# Altium PCB AccTop.PcbDoc
Units mil, origin at the board's own origin, x right, y up, seen from the top; angles counter-clockwise.
Board outline 12807.23 x 5466.85 mil, 2 copper layers (Top Layer, Bottom Layer), stack 42.17 mil thick; 34 components, 32 nets, 123 pads, 31 vias.
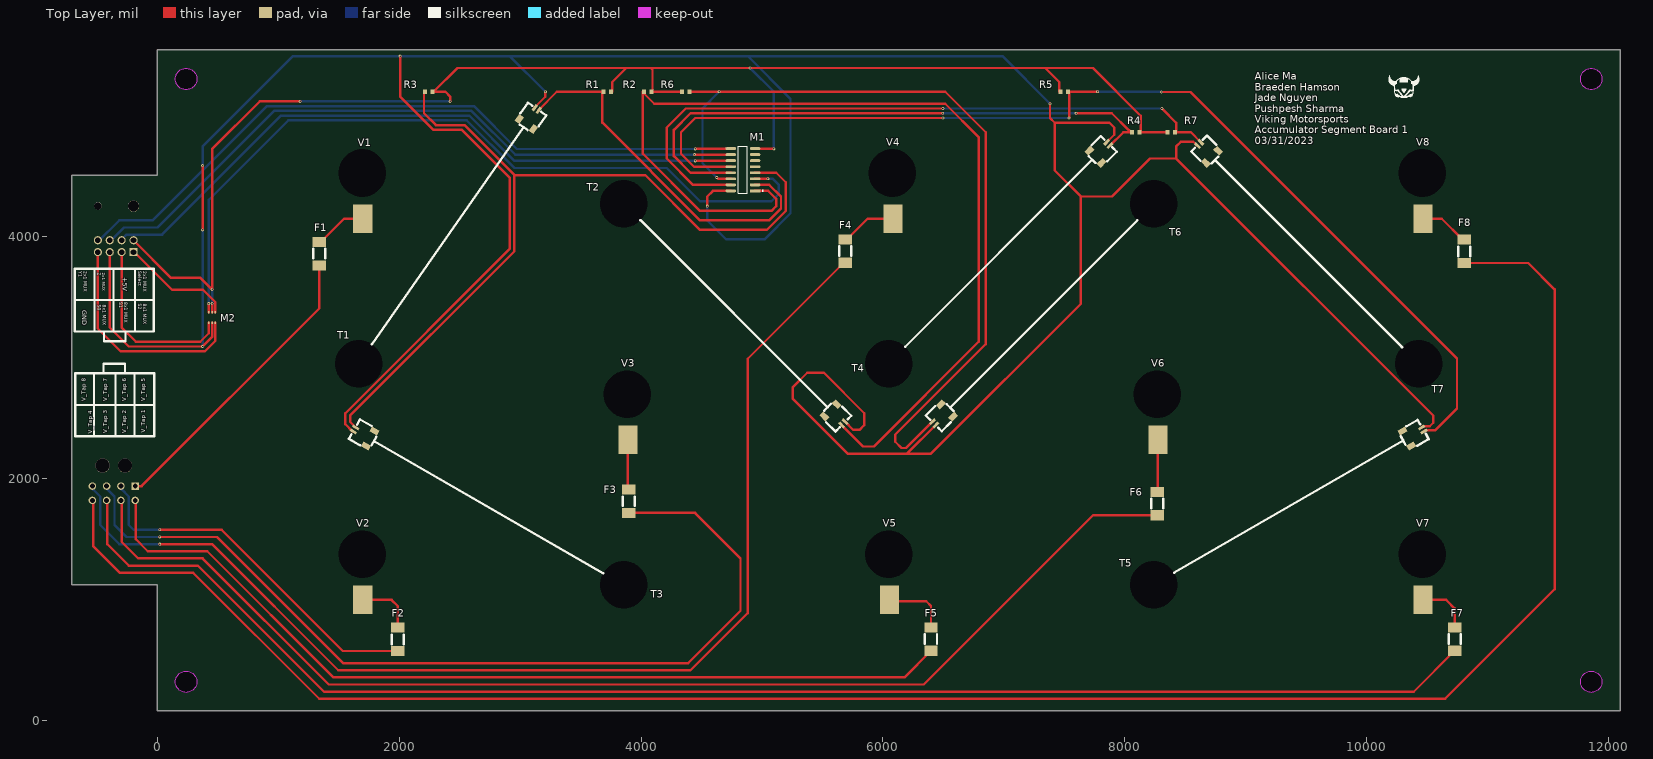
[diagram p0: Top Layer view]
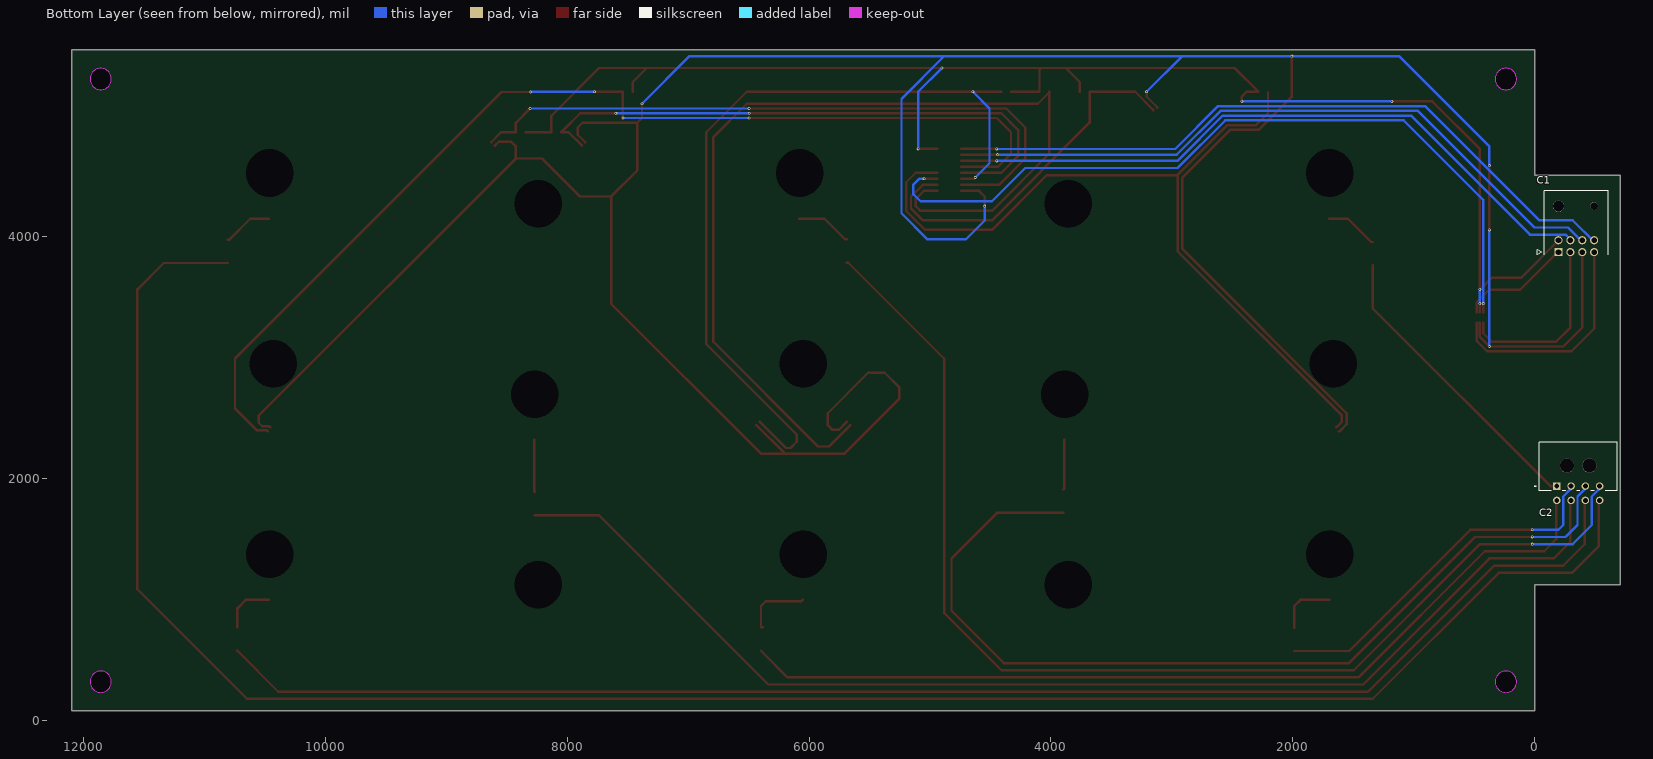
[diagram p1: Bottom Layer view, seen from below]
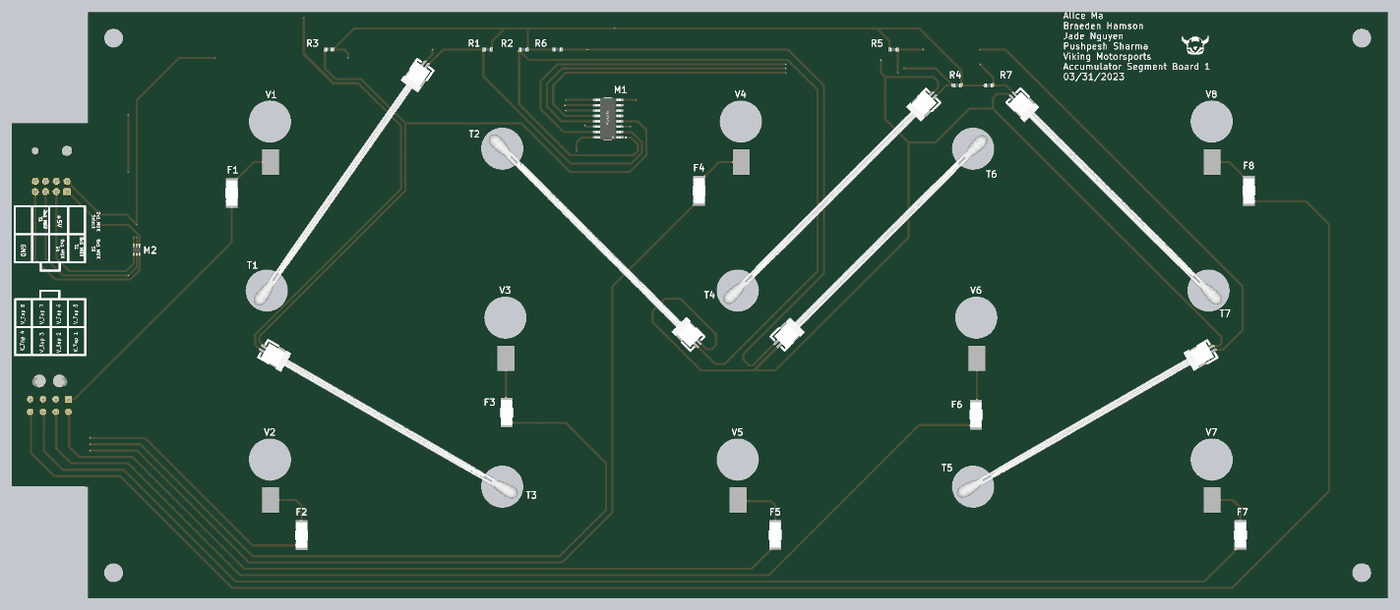
[diagram p2: 3D render of the assembled board from above, using the file's embedded part models]

## Layer stack, top to bottom
Top Solder: solder mask 0.4, Solder Resist, Dk 3.5
Top Layer: signal copper 1.4
Dielectric 1: dielectric 39.3701, FR-4, Dk 4.8
Bottom Layer: signal copper 1.4
Bottom Solder: solder mask 0.4, Solder Resist, Dk 3.5

## Board outline
0.54,4507.87 -708.66,4507.87 -708.66,1122.05 -118.11,1122.05 0.54,1122.05 0.54,78.74 12098.57,78.74 12098.57,5545.59 0.54,5545.59
cut-out: 11858.22,5214.43 cw(c11858.22,5302.93) 11769.72,5302.93 cw(c11858.22,5302.93) 11858.22,5391.43 cw(c11858.22,5302.93) 11946.72,5302.93 cw(c11858.22,5302.93)
cut-out: 11858.22,229.31 cw(c11858.22,317.81) 11769.72,317.81 cw(c11858.22,317.81) 11858.22,406.31 cw(c11858.22,317.81) 11946.72,317.81 cw(c11858.22,317.81)
cut-out: 237.82,229.31 cw(c237.82,317.81) 149.32,317.81 cw(c237.82,317.81) 237.82,406.31 cw(c237.82,317.81) 326.32,317.81 cw(c237.82,317.81)
cut-out: 237.82,5214.43 cw(c237.82,5302.93) 149.32,5302.93 cw(c237.82,5302.93) 237.82,5391.43 cw(c237.82,5302.93) 326.32,5302.93 cw(c237.82,5302.93)

## Design rules (kind name [scope] priority, off if disabled: settings)
Clearance [All] p1: gap=0.3 ignorepadtopadclearanceinfootprint=FALSE
PolygonConnect [All] p1: connectstyle=Relief reliefconductorwidth=10 reliefentries=4 polygonreliefangle="90 Angle" airgapwidth=10
RoutingVias [All] p1: holewidth=11.81 width=23.62 viastyle="Through Hole" minholewidth=11.81 minwidth=23.62 maxholewidth=11.81 maxwidth=23.62
SolderMaskExpansion [All] p1: expansion=4 istentingtop=FALSE
Width [All] p1: maxlimit=19.68 minlimit=11.81 preferedwidth=19.68
30 further rules are at their usual default settings.

## Components (designator, comment, footprint, x,y, rotation, side; value= is the part's Value field where it differs from the comment)
C1 "1053141208" "8 PIN DUAL NANO CONNECTOR" -196.85,3870.87 r0 bottom
C2 "0430450800" "8 PIN DUAL CONNECTOR" -360.24,2092.32 r0 bottom
F1 "0ACG-1000-TE" Fuse 1338.58,3858.27 r90 top
F2 "0ACG-1000-TE" Fuse 1988.19,669.29 r90 top
F3 "0ACG-1000-TE" Fuse 3897.64,1811.02 r90 top
F4 "0ACG-1000-TE" Fuse 5688.98,3879.72 r90 top
F5 "0ACG-1000-TE" Fuse 6397.64,671.06 r90 top
F6 "0ACG-1000-TE" Fuse 8267.72,1791.34 r90 top
F7 "0ACG-1000-TE" Fuse 10728.35,671.06 r90 top
F8 "0ACG-1000-TE" Fuse 10807.09,3877.95 r90 top
M1 "74HC4051D,653" 8x1MUX 4842.55,4552.56 r180 top
M2 "74LVC1G3157GW,125" 2x1MUX 401.58,3374.02 r270 top
R1 "RC0805FR-133K3L" 3.3kRes 3720.47,5196.85 r0 top value=3.3kR
R2 "RC0805FR-133K3L" 3.3kRes 4055.12,5196.85 r0 top value=3.3kR
R3 "RC0805FR-133K3L" 3.3kRes 2244.09,5196.85 r0 top value=3.3kR
R4 "RC0805FR-133K3L" 3.3kRes 8090.55,4862.2 r0 top value=3.3kR
R5 "RC0805FR-133K3L" 3.3kRes 7500,5196.85 r180 top value=3.3kR
R6 "RC0805FR-133K3L" 3.3kRes 4370.08,5196.85 r180 top value=3.3kR
R7 "RC0805FR-133K3L" 3.3kRes 8385.83,4862.2 r180 top value=3.3kR
T1 "Thermistor" Thermistor 3153.75,5042.45 r325 top
T2 "Thermistor" Thermistor 5658.66,2441.75 r225 top
T3 "Thermistor" Thermistor 1641.2,2421.97 r60 top
T4 "Thermistor" Thermistor 7878.42,4751.98 r315 top
T5 "Thermistor" Thermistor 10474.52,2387.88 r300 top
T6 "Thermistor" Thermistor 6409.54,2469.59 r135 top
T7 "Thermistor" Thermistor 8629.31,4779.82 r45 top
V1 "V_Tap" "Voltage tap" 1693.69,4525.26 r0 top
V2 "V_Tap" "Voltage tap" 1693.69,1373.58 r0 top
V3 "V_Tap" "Voltage tap" 3885.62,2696.32 r0 top
V4 "V_Tap" "Voltage tap" 6077.55,4525.26 r0 top
V5 "V_Tap" "Voltage tap" 6048.02,1373.58 r0 top
V6 "V_Tap" "Voltage tap" 8269.48,2696.32 r0 top
V7 "V_Tap" "Voltage tap" 10461.41,1373.58 r0 top
V8 "V_Tap" "Voltage tap" 10461.41,4525.26 r0 top

## Footprints (in the part's own frame and the unit in brackets; to place one, negate y for a bottom-side part, rotate by r counter-clockwise, add the part's x,y. Pads: shape width x height; smd on the part's side, far side on the other; paste and mask are expansions set on the pad)
2x1MUX [mm]
  rect 0.45x0.3 smd: 1(0,1.95) 2(0,1.3) 3(0,0.6) 4(2.2,0.6) 5(2.2,1.3) 6(2.2,1.95)
  body extent 0.1,0.3 2.2,2.3, height 1.11
3.3kRes [mm]
  rect 0.87x0.93 smd: 1(-0.78,0) 2(0.78,0)
  body extent -0.8,-0.4 0.8,0.4, height 0.55
"8 PIN DUAL CONNECTOR" [mm]
  rect 1.57x1.57 hole 1.02 paste-1000 mask+0: 1(4.5,3.965)
  round 1.57 hole 1.02 paste-1000 mask+0: 2(1.5,3.965) 3(-1.5,3.965) 4(-4.5,3.965) 5(4.5,6.965) 6(1.5,6.965) 7(-1.5,6.965) 8(-4.5,6.965)
  round 3 hole 3 unplated paste-1000 mask+0: ""(-2.35,-0.355) ""(2.35,-0.355)
  silkscreen extent -8.2,-5.21 9.13,4.95, body extent -8,-4.72 8.15,7.52, height 8.78
"8 PIN DUAL NANO CONNECTOR" [mm]
  rect 1.7x1.7 / inner round 1.7 / far side rect 1.7x1.7 hole 1.2 mask+0.076: 1(0,0)
  round 1.7 hole 1.2 mask+0.076: 2(-2.5,0) 3(-5,0) 4(-7.5,0) 5(0,-2.5) 6(-2.5,-2.5) 7(-5,-2.5) 8(-7.5,-2.5)
  round 1.6 hole 1.6 unplated mask+0.076: 9(-7.5,-9.68)
  round 2.37 hole 2.37 unplated mask+0.076: 10(0,-9.68)
  silkscreen extent -10.47,-12.89 4.5,0.59, body extent -9.15,-14.2 1.79,0.46, height 9.15
8x1MUX [mil]
  rect 86.79x23.94 smd paste+0 mask+0: 1(-100.43,175)
  rrect100% 86.79x23.94 smd paste+0 mask+0: 2(-100.43,125) 3(-100.43,75) 4(-100.43,25) 5(-100.43,-25) 6(-100.43,-75) 7(-100.43,-125) 8(-100.43,-175) 9(100.43,-175) 10(100.43,-125) 11(100.43,-75) 12(100.43,-25) 13(100.43,25) 14(100.43,75) 15(100.43,125) 16(100.43,175)
  silkscreen extent -168,-195 37,195, body extent -164,-215 164,215, height 10
Fuse [mm]
  rect 2.15x2.8 smd: 1(-2.455,0) 2(2.455,0)
  silkscreen extent -1,-1.27 1,1.27, body extent -3.05,-1.39 3.05,1.4, height 2.55
Thermistor [mm]
  rect 0.6x1.55 smd: 1(-1,0) 2(0,0)
  rect 1.2x1.8 smd: ""(-2.325,-3.825) ""(1.3,-3.825)
  oval 0.6x1.2 hole 10 unplated: ""(-0.5,-65.25)
  silkscreen extent -2.8,-60.32 1.9,0.08, body extent -3.12,-69.41 1.88,0.18, height 1.24
"Voltage tap" [mm]
  rect 4x6 smd: 1(0.125,-9.6)
  round 3 hole 10 unplated: ""(0,0)

## Part data
C1: "Nano-Fit Right-Angle Header, Through Hole, 2.50mm Pitch, Dual Row, 8 Circuits, Glow-Wire Capable, Tray", Manufacturer_Name=Molex, Mouser Part Number=N/A, Arrow Part Number=1053141208, Arrow Price/Stock=https://www.arrow.com/en/products/105314-1208/molex?region=nac, Datasheet Link=https://www.molex.com/pdm_docs/sd/1053141104_sd.pdf, Geometry.Height=9.14mm, Manufacturer_Part_Number=1053141208, Mouser Price/Stock=https://www.mouser.com/Search/Refine.aspx?Keyword=N%2FA
C2: "Rectangular Power Connector, 8 Contact(s), Male, Solder Terminal, Receptacle", Color=Black, Contact Resistance=10mR, Current Rating=5A, Dielectric Withstanding Voltage (AC)=1.5kV, Flammability Rating="UL94 V-0", Insulation Resistance=1GR, Manufacturer=Molex, Manufacturer Part Number=43025-0800, Max Operating Temperature=105°C, Max Voltage Rating (AC)=600V, Max Voltage Rating (DC)=600.6kV, Min Operating Temperature=-40°C, Package Quantity=2500, Supplier Part Number=538-43025-0800, Voltage Rating=250V, Approvals=UL,CSA,TUV, Board Mounting Option=PEG, Body Breadth=0.345inch, Body Depth=0.48inch, Body Length=0.616inch, Body/Shell Style=RECEPTACLE, Category="Headers and Wire Housings", ComponentLink1Description=https://datasheet.ciiva.com:443/pdfs/VipMasterIC/IC/MOLE/MOLE-S-A0003536766/MOLE-S-A0003536766-1.pdf?src-supplier=IHS+Markit, ComponentLink1URL=https://datasheet.ciiva.com:443/pdfs/VipMasterIC/IC/MOLE/MOLE-S-A0003536766/MOLE-S-A0003536766-1.pdf?src-supplier=IHS+Markit, ComponentLink2Description=https://datasheet.ciiva.com/19462/883536-19462164.pdf?src-supplier=Jameco, ComponentLink2URL=https://datasheet.ciiva.com/19462/883536-19462164.pdf?src-supplier=Jameco, ComponentLink3Description=https://datasheet.ciiva.com/7683/27645-7683683.pdf?src-supplier=Element14, ComponentLink3URL=https://datasheet.ciiva.com/7683/27645-7683683.pdf?src-supplier=Element14, ComponentLink4Description=https://datasheet.ciiva.com/30198/267770430450800-pcb-headers-30198875.pdf?src-supplier=Onlinecomponents.com, ComponentLink4URL=https://datasheet.ciiva.com/30198/267770430450800-pcb-headers-30198875.pdf?src-supplier=Onlinecomponents.com, ComponentLink5Description=https://datasheet.ciiva.com/5158/0430450800-pcb-headers-142625-5158817.pdf?src-supplier=Mouser, ComponentLink5URL=https://datasheet.ciiva.com/5158/0430450800-pcb-headers-142625-5158817.pdf?src-supplier=Mouser, ComponentLink6Description=https://datasheet.ciiva.com/11751/0900766b80027348-11751142.pdf?src-supplier=Rs, ComponentLink6URL=https://datasheet.ciiva.com/11751/0900766b80027348-11751142.pdf?src-supplier=Rs, ComponentLink7Description=https://datasheet.ciiva.com/10087/0430450800-pcb-headers-10087853.pdf?src-supplier=Avnet, ComponentLink7URL=https://datasheet.ciiva.com/10087/0430450800-pcb-headers-10087853.pdf?src-supplier=Avnet, ComponentLink8Description=https://datasheet.ciiva.com/14155/04402310-14155206.pdf?src-supplier=Distrelec, ComponentLink8URL=https://datasheet.ciiva.com/14155/04402310-14155206.pdf?src-supplier=Distrelec, ComponentLink9Description=https://datasheet.ciiva.com/1443/1850016-1443537.pdf?src-supplier=Element14, ComponentLink9URL=https://datasheet.ciiva.com/1443/1850016-1443537.pdf?src-supplier=Element14, Connector Type=Power,Rectangular, Contact Finish - Mating=TIN, Contact Finish - Termination="Bright Tin (Sn) - with Nickel (Ni) barrier", Contact Gender=Female, Contact Material=Bronze, Contact Pattern=RECTANGULAR, Contact Plating=Tin, Contact Style="SQ PIN-SKT", Contact Type="Male Pin", Depth=14mm, DIN Conformance=No, Durability=30Cycles, Empty Shell=No, Fastening Type=Ramp, Filter Feature=No, Gender=Female, Glow Wire Compliant=Non-compliant, Halogen Free="Low Halogen", Housing Color=Black, Housing Material=Polyester, IEC Conformance=No, Insertion Force-Max=11.5648N, Insulation Color=Black, Insulation Material=Polymer, JESD-609 Code=e3, Lead Free="Lead Free", Length=12.85mm, Material=Polyester, Mating Contact Pitch=0.118inch, Mating Contact Row Spacing=0.118inch, Mating Information="MULTIPLE MATING PARTS AVAILABLE", MIL Conformance=No, Mixed Contacts=No, Mounting Option 1="POLARIZED LCK", Mounting Option 2=LOCKING, Mounting Style="RIGHT ANGLE", Mounting Technology="Cable,Free Hanging", Number of Circuits=8, Number Of Connectors=1, Number of Contacts=8, Number Of PCB Rows=2, Number of Poles=8, Number of Positions=8, Number of Rows=2, Number of Rows Loaded=2, Option="General Purpose", Orientation=Straight, Packaging=Bulk, PCB Contact Pattern=RECTANGULAR, PCB Contact Row Spacing=2.9972mm, Pitch=3mm, Plating Thickness=100uin, Polarization Key="POLARIZED HOUSING", Pricing="1=0.62000, 10=0.52700, 50=0.52700, 100=0.40900, 500=0.39000, 1000=0.32200, 2500=0.29200, 5000=0.26200, 10000=0.25900, 25000=0.25300 (USD)", Radiation Hardening=No, Rated Current (Signal)=5A, Reach SVHC Compliant=Yes, Reference Standard=UL, Reliability=COMMERCIAL, RoHS=Yes, RoHS Compliant=Yes, Row Spacing=0.118inch, Series=43025, Shell Material=Polymer, Stock=49424, Supplier=Mouser, Terminal Length=0.125inch, Terminal Pitch=2.9972mm, Termination=Crimp, Voltage Rating (AC)=250V, Width=11.56mm, Withdrawl Force-Min=3.0024N, Working Voltage=250V
F1 F2 F3 F4 F5 F6 F7 F8: "Electric Fuse, 1A, 350VAC, 500VDC, 100A (IR), Surface Mount", Manufacturer=Bel, Supplier Part Number=71AJ7068, Category=Fuses, Manufacturer Part Number=0ACG-1000-TE, Pricing="1=3.46000, 10=3.34000, 25=2.98000, 50=2.62000, 100=2.14000, 250=2.08000 (USD)", RoHS=Yes, Stock=965, Supplier=Newark
M1: library part 74HC4051D, "IC MUX/DEMUX 8X1 16SOIC"
M2: "Single-Ended Multiplexer, 1 Func, 2 Channel, CMOS, PDSO6", Case/Package=TSSOP, Manufacturer=Nexperia, Max Operating Temperature=125°C, Max Supply Voltage=5.5V, Min Operating Temperature=-40°C, Min Supply Voltage=1.65V, Nominal Supply Voltage=2.7V, On-state Resistance-Max (Ron)=38R, Package Body Material=Plastic, Package Shape=Rectangular, Package Style="SMALL OUTLINE, THIN PROFILE, SHRINK PITCHMeter", Peak Reflow Temperature (Cel)=260°C, Supplier Part Number=9326695, Temperature Grade=AUTOMOTIVE, Time @ Peak Reflow Temperature-Max (s)=30s, Category="Decoders and Multiplexers", Channels=1, ComponentLink1Description=http://www.farnell.com/datasheets/2053574.pdf?src-supplier=Farnell, ComponentLink1URL=http://www.farnell.com/datasheets/2053574.pdf?src-supplier=Farnell, ComponentLink2Description=https://assets.nexperia.com/documents/data-sheet/74LVC1G3157.pdf?src-supplier=Digi-Key, ComponentLink2URL=https://assets.nexperia.com/documents/data-sheet/74LVC1G3157.pdf?src-supplier=Digi-Key, ComponentLink3Description=https://datasheet.ciiva.com:443/pdfs/VipMasterIC/IC/PHGL/PHGLS25912/PHGLS25912-1.pdf?src-supplier=IHS+Markit, ComponentLink3URL=https://datasheet.ciiva.com:443/pdfs/VipMasterIC/IC/PHGL/PHGLS25912/PHGLS25912-1.pdf?src-supplier=IHS+Markit, Height - Seated (Max)=1.1mm, JESD-30 Code=R-PDSO-G6, JESD-609 Code=e3, Length=2mm, Manufacturer Part Number=74LVC1G3157GW,125, Moisture Sensitivity Level=1, Number of Channels=2, Off-state Isolation-Nom=42dB, Pins=6, Pricing="3000=0.09980, 9000=0.09590, 12000=0.09490, 30000=0.09180, 45000=0.08880 (USD)", Qualification Status="Not Qualified", Reach SVHC Compliant=Yes, RoHS=Yes, RoHS Compliant=Yes, Stock=114000, Supplier="Future Electronics", Surface Mount=Yes, Switch-off Time-Max=5ns, Switch-on Time-Max=6ns, Technology=CMOS, Terminal Finish=Tin, Terminal Form="Gull Wing", Terminal Pitch=0.65mm, Terminal Position=DUAL, Throw Configuration="SINGLE-ENDED MULTIPLEXER", Width=1.25mm
R1 R2 R3 R4 R5 R6 R7: "Fixed Resistor, Metal Glaze/thick Film, 0.125W, 3300ohm, 150V, 1% +/-Tol, 100ppm/Cel, Surface Mount, 0805", Case Code (Imperial)=0805, Case Code (Metric)=2012, Manufacturer="KOA Speer", Manufacturer Part Number=RK73G2ATTD3301F, Max Operating Temperature=125°C, Min Operating Temperature=-55°C, Package Height=0.5mm, Package Length=2mm, Package Shape=Rectangular, Package Style=SMTMeter, Package Width=1.25mm, Power=125mW, Rated Temperature=70°C, Resistance=3.3kR, Resistor Type="Thick Film", Supplier Part Number 1=3067720, Temperature Coefficient=50ppm/°C, Tolerance=1%, Voltage Rating=150V, Additional Feature="HIGH PRECISION", Case/Package=0805, Category="Chip SMD Resistors", ComponentLink1Description=https://datasheet.ciiva.com:443/pdfs/VipMasterIC/IC/KOAS/KOAS-S-A0009827357/KOAS-S-A0009827357-1.pdf?src-supplier=IHS+Markit, ComponentLink1URL=https://datasheet.ciiva.com:443/pdfs/VipMasterIC/IC/KOAS/KOAS-S-A0009827357/KOAS-S-A0009827357-1.pdf?src-supplier=IHS+Markit, ComponentLink2Description=https://datasheet.ciiva.com/5554/rk73g-5554844.pdf?src-supplier=Mouser, ComponentLink2URL=https://datasheet.ciiva.com/5554/rk73g-5554844.pdf?src-supplier=Mouser, ComponentLink3Description=https://datasheet.ciiva.com:443/pdfs/VipMasterIC/IC/YAGO/YAGO-S-A0008145938/YAGO-S-A0008145938-1.pdf?src-supplier=IHS+Markit, ComponentLink3URL=https://datasheet.ciiva.com:443/pdfs/VipMasterIC/IC/YAGO/YAGO-S-A0008145938/YAGO-S-A0008145938-1.pdf?src-supplier=IHS+Markit, ComponentLink4Description=http://www.mouser.com/ds/2/447/Yageo_08112016_RC0805-968729.pdf?src-supplier=Mouser, ComponentLink4URL=http://www.mouser.com/ds/2/447/Yageo_08112016_RC0805-968729.pdf?src-supplier=Mouser, ComponentLink5Description=http://www.yageo.com/pdf/PYu-RC0805_51_RoHS_L_4.pdf?src-supplier=Avnet, ComponentLink5URL=http://www.yageo.com/pdf/PYu-RC0805_51_RoHS_L_4.pdf?src-supplier=Avnet, Construction=Rectangular, Depth=1.25mm, JESD-609 Code=e3, Length=2mm, Military Standard=Not, Mounting Technology="Surface Mount", Packaging="Tape and Reel", Pins=2, Power Rating=125mW, Pricing="1=0.2602, 10=0.219, 25=0.2168, 100=0.0859, 250=0.0829, 500=0.0771, 1000=0.0463, 3000=0.0331 (USD)", Reach SVHC Compliant=Yes, Reference Standard=AEC-Q200, RoHS=Yes, RoHS Compliant=Yes, Series=RK73G, Stock=4469, Supplier="Arrow Electronics", Supplier 1="Future Electronics", Supplier Part Number=RK73G2ATTD3301F, Technology="THICK FILM/METAL GLAZE", Terminal Finish=Nickel, Termination=SMD/SMT, Working Voltage=150V

## Via types
v1: diameter 23.62, hole 11.81, Top Layer to Bottom Layer, tented both sides, 31 vias

## Nets (pads, with @x,y where several pads share a name; then routed paths per layer and width w, separated by ;. In a path a pad name is that pad's centre, name@x,y a point inside that pad or via, vN(x,y) a via of type N, cw(c..) or ccw(c..) an arc to the next point about the centre after c; other vN are vias at no path point)
"+5 V": C1.3 M1.16 M2.5 T1.1 T2.1 T3.1 T4.1 T5.1 T6.1 T7.1 | length 29737.1
  Top Layer w19.68: C1.3@-393.7,3874.64 -393.7,3248.03 -236.22,3090.55 v1(374.02,3090.55) 452.76,3169.29 M2.5 ; v1(374.02,4055.12) v1(374.02,4586.61) ; T3.1 1614.67,2387.88 1555.12,2447.43 1555.12,2539.37 2913.39,3897.64 2913.39,4488.19 2519.68,4881.89 2283.46,4881.89 2007.87,5157.48 v1(2007.87,5492.13) ; T1.1 3121.5,5069.62 3207.91,5156.03 3207.91,5196.1 v1(3208.66,5196.85) ; v1(4547.24,4251.97) 4547.24,4330.71 4594.09,4377.56 M1.16@4744.09,4377.56 ; T2.1 5754.51,2401.57 5807.09,2401.57 5846.46,2440.94 5846.46,2539.37 5511.81,2874.02 5374.02,2874.02 5255.91,2755.91 5255.91,2657.48 5708.66,2204.72 6200.36,2204.72 ; T6.1 6200.36,2204.72 ; v1(7381.89,5098.43) 7381.89,4980.32 7421.26,4940.94 ; T4.1 7850.69,4779.82 7913.39,4842.52 7913.39,4901.57 7874.02,4940.94 7421.26,4940.94 ; T7.1 8598.69,4751.98 8567.21,4783.46 8464.57,4783.46 8425.2,4744.09 8425.2,4645.67 ; T5.1 10464.43,2431.57 10522.12,2431.57 10551.18,2460.63 10551.18,2519.69 8425.2,4645.67 ; 6200.36,2204.72 6397.64,2204.72 7637.8,3444.88 7637.8,4330.71 ; 7421.26,4940.94 7421.26,4547.24 7637.8,4330.71 ; 7637.8,4330.71 7893.7,4330.71 8208.66,4645.67 8425.2,4645.67
  Bottom Layer w19.68: v1(374.02,3090.55) v1(374.02,4055.12) ; v1(374.02,4586.61) 374.02,4744.09 1122.05,5492.13 v1(2007.87,5492.13) 2913.39,5492.13 ; v1(3208.66,5196.85) 2913.39,5492.13 ; v1(4547.24,4251.97) 4547.24,4133.86 4704.72,3976.38 5019.69,3976.38 5236.22,4192.91 5236.22,5137.8 4881.89,5492.13 ; v1(7381.89,5098.43) 6988.19,5492.13 4881.89,5492.13 ; 2913.39,5492.13 4881.89,5492.13
GND: C1.5 M1.8 M2.2 R1.2 R2.2 R3.2 R4.2 R5.2 R6.2 R7.2 | length 12771.7
  Top Layer w19.68: C1.5 113.98,3658.46 357.28,3658.46 v1(452.76,3562.99) 452.76,4724.41 846.46,5118.11 v1(1181.1,5118.11) ; M2.2 v1(452.76,3444.88) ; v1(2421.26,5118.11) 2421.26,5157.48 2381.89,5196.85 2284.47,5196.85 2481.32,5393.7 3877.95,5393.7 ; R1.2@3760.85,5196.85 3760.85,5276.59 3877.95,5393.7 ; R6.2@4329.71,5196.85 4095.49,5196.85 4094.49,5197.85 4094.49,5382.17 4082.96,5393.7 ; M1.8@4941.01,4727.56 M1.8 5094.21,4727.56 5097.36,4724.41 v1(5098.43,4724.41) ; R5.2@7459.63,5196.85 7459.63,5276.59 7342.52,5393.7 ; R7.2@8345.45,4862.2 8130.93,4862.2 8130.93,4999 7736.22,5393.7 7342.52,5393.7 ; 3877.95,5393.7 4082.96,5393.7 ; 4082.96,5393.7 v1(4901.57,5393.7) 7342.52,5393.7
  Bottom Layer w19.68: v1(452.76,3444.88) v1(452.76,3562.99) ; v1(1181.1,5118.11) v1(2421.26,5118.11) ; v1(4901.57,5393.7) 5098.43,5196.85 v1(5098.43,4724.41)
NetC1_1: C1.1 M2.1 | length 930.6
  Top Layer w19.68: C1.1 -173.23,3847.24 -166.14,3847.24 121.06,3560.04 376.97,3560.04 478.35,3458.66 M2.1
NetC1_2: C1.2 M2.4 | length 1510.4
  Top Layer w19.68: C1.2@-295.28,3873.09 -295.28,3248.03 -177.17,3129.92 354.33,3129.92 425.2,3200.79 M2.4
NetC1_4: C1.4 M2.6 | length 1868.5
  Top Layer w19.68: C1.4@-492.13,3873.09 -492.13,3239.88 -303.43,3051.18 393.7,3051.18 478.35,3135.83 M2.6
NetC1_6: C1.6 M1.11 | length 5605.1
  Top Layer w19.68: v1(4448.82,4625.98) 4449.88,4625.98 4451.46,4627.56 M1.11@4744.09,4627.56
  Bottom Layer w19.68: C1.6@-285.48,3986.18 -255.91,4015.75 39.37,4015.75 1023.62,5000 2578.74,5000 2952.76,4625.98 v1(4448.82,4625.98)
NetC1_7: C1.7 M1.10 | length 5696.7
  Top Layer w19.68: v1(4441.34,4677.56) M1.10@4744.09,4677.56
  Bottom Layer w19.68: C1.7@-365.84,3984.55 -275.59,4074.8 0,4074.8 964.57,5039.37 2598.43,5039.37 2960.24,4677.56 v1(4441.34,4677.56)
NetC1_8: C1.8 M1.9 | length 5846.2
  Top Layer w19.68: v1(4448.82,4724.41) 4449.88,4724.41 4453.03,4727.56 M1.9 M1.9@4744.09,4727.56
  Bottom Layer w19.68: C1.8@-490.13,3958.69 -314.96,4133.86 -39.37,4133.86 905.51,5078.74 2618.11,5078.74 2972.44,4724.41 v1(4448.82,4724.41)
NetC2_1: C2.1 F1.1 | length 2486.8
  Top Layer w19.68: C2.1 -129.92,1936.22 1338.58,3404.72 F1.1
NetC2_2: C2.2 F2.1 | length 3004.8
  Top Layer w19.68: v1(19.68,1574.8) 531.5,1574.8 1533.66,572.64 F2.1
  Bottom Layer w19.68: C2.2 -293.12,1928.16 -293.12,1907.29 -236.22,1850.39 -236.22,1614.17 -196.85,1574.8 v1(19.68,1574.8)
NetC2_3: C2.3 F3.1 | length 7692.3
  Top Layer w19.68: v1(19.68,1515.75) 492.13,1515.75 1535.43,472.44 4389.76,472.44 4822.83,905.51 4822.83,1338.58 4447.05,1714.37 F3.1
  Bottom Layer w19.68: C2.3 -411.23,1928.16 -411.23,1907.29 -354.33,1850.39 -354.33,1614.17 -255.91,1515.75 v1(19.68,1515.75)
NetC2_4: C2.4 F4.1 | length 9635.4
  Top Layer w19.68: v1(19.68,1456.69) 452.76,1456.69 1496.06,413.39 4409.45,413.39 4881.89,885.83 4881.89,2988.78 5676.18,3783.07 F4.1
  Bottom Layer w19.68: C2.4 -529.34,1928.16 -529.34,1907.29 -472.44,1850.39 -472.44,1614.17 -314.96,1456.69 v1(19.68,1456.69)
NetC2_5: C2.5 F5.1 | length 7461.7
  Top Layer w19.68: C2.5@-177.17,1818.85 -177.17,1496.06 -78.74,1397.64 413.39,1397.64 1456.69,354.33 6177.56,354.33 F5.1
NetC2_6: C2.6 F6.1 | length 9974.4
  Top Layer w19.68: C2.6@-295.28,1818.91 -295.28,1476.38 -157.48,1338.58 374.02,1338.58 1417.32,295.28 6338.58,295.28 7737.99,1694.69 F6.1
NetC2_7: C2.7 F7.1 | length 12160
  Top Layer w19.68: C2.7@-413.39,1828.78 -413.39,1455.71 -235.24,1277.56 336.61,1277.56 1377.95,236.22 10390.16,236.22 F7.1
NetC2_8: C2.8 F8.1 | length 16680.7
  Top Layer w19.68: C2.8@-531.5,1817.14 -531.5,1439.96 -310.04,1218.5 297.24,1218.5 1338.58,177.17 10649.61,177.17 11555.12,1082.68 11555.12,3562.99 11336.81,3781.3 F8.1
NetF1_2: F1.2 V1.1 | length 439.7
  Top Layer w19.68: F1.2 1351.38,3954.92 1543.76,4147.3 V1.1
NetF2_2: F2.2 V2.1 | length 489.5
  Top Layer w19.68: V2.1 1937.44,995.63 1988.19,944.88 F2.2
NetF3_2: F3.2 V3.1 | length 413.6
  Top Layer w19.68: V3.1 3890.54,1914.78 F3.2
NetF4_2: F4.2 V4.1 | length 464.3
  Top Layer w19.68: F4.2 5701.77,3976.38 5872.7,4147.3 V4.1
NetF5_2: F5.2 V5.1 | length 555.7
  Top Layer w19.68: V5.1 6064.32,984.25 6358.27,984.25 6397.64,944.88 F5.2 F5.2@6384.84,767.72
NetF6_2: F6.2 V6.1 | length 433.1
  Top Layer w19.68: F6.2 8274.4,1894.67 V6.1
NetF7_2: F7.2 V7.1 | length 448.7
  Top Layer w19.68: V7.1 10657.92,995.63 10669.28,984.26 10728.35,925.2 F7.2
NetF8_2: F8.2 V8.1 | length 412.3
  Top Layer w19.68: V8.1 10621.59,4147.3 10794.29,3974.61 F8.2
NetM1_3: M1.3 M2.3 | length 6511.3
  Top Layer w19.68: M2.3 v1(425.2,3444.88) ; M1.3@4941.01,4477.56 M1.3 v1(5048.93,4477.56)
  Bottom Layer w19.68: v1(425.2,3444.88) 425.2,4303.15 1082.68,4960.63 2559.06,4960.63 2952.76,4566.93 4212.6,4566.93 4488.19,4291.34 5078.74,4291.34 5137.8,4350.39 5137.8,4429.13 5090.12,4476.81 5049.69,4476.81 v1(5048.93,4477.56)
T1_Out: M1.2 R1.1 T1.2 | length 3055.8
  Top Layer w19.68: T1.2 3153.75,5047.04 3303.56,5196.85 3680.1,5196.85 3680.1,4941.95 4488.19,4133.86 5059.06,4133.86 5157.48,4232.28 5157.48,4330.71 5060.63,4427.56 M1.2@4941.01,4427.56
T2_Out: M1.1 R2.1 T2.2 | length 8278.2
  Top Layer w19.68: R2.1@4014.75,5196.85 R2.1@4014.75,5192.78 ; M1.1@4941.01,4377.56 5051.57,4377.56 5118.11,4311.02 5118.11,4251.97 5078.74,4212.6 4488.19,4212.6 4014.75,4686.04 R2.1@4014.75,5192.78 ; T2.2 5836.63,2263.78 5925.2,2263.78 6791.34,3129.92 6791.34,4822.83 6515.75,5098.43 4109.1,5098.43 R2.1@4014.75,5192.78
T3_Out: M1.4 R3.1 T3.2 | length 6825.6
  Top Layer w19.68: T3.2 1594.49,2468.69 1594.49,2519.69 2952.76,3877.95 2952.76,4507.87 ; R3.1@2204.72,5195.85 2204.72,5019.68 2303.15,4921.26 2539.37,4921.26 2952.76,4507.87 ; M1.4@4941.01,4527.56 5118.11,4527.56 5196.85,4448.82 5196.85,4212.6 5039.37,4055.12 4488.19,4055.12 4035.43,4507.87 2952.76,4507.87
T4_Out: M1.13 R4.1 T4.2 | length 4866.7
  Top Layer w19.68: M1.13@4744.09,4527.56 4409.45,4527.56 4271.65,4665.35 4271.65,4881.89 4409.45,5019.68 v1(6494.63,5019.68) ; v1(7598.43,5019.68) 7892.7,5019.68 8031.24,4881.15 8035.31,4881.15 8050.18,4866.28 8050.18,4862.21 7988.64,4862.21 T4.2
  Bottom Layer w19.68: v1(6494.63,5019.68) v1(7598.43,5019.68)
T5_Out: M1.12 R5.1 T5.2 | length 8996.4
  Top Layer w19.68: M1.12@4744.09,4577.56 4438.19,4577.56 4330.71,4685.04 4330.71,4862.2 4448.82,4980.32 v1(6496.06,4980.32) ; v1(7539.37,4980.32) 7539.87,4980.82 7539.87,5196.35 7540.37,5196.85 v1(7775.59,5196.85) ; v1(8304.47,5195.35) 8544.8,5195.35 10748.03,2992.13 10748.03,2578.74 10566.52,2397.23 10483.87,2397.23 T5.2
  Bottom Layer w19.68: v1(6496.06,4980.32) v1(7539.37,4980.32) ; v1(7775.59,5196.85) 8302.97,5196.85 v1(8304.47,5195.35)
T6_Out: M1.14 R6.1 T6.2 | length 6804
  Top Layer w19.68: R6.1@4410.45,5196.85 v1(4645.67,5196.85) 6515.75,5196.85 6850.39,4862.2 6850.39,3110.24 6102.36,2362.2 6102.36,2303.15 6154.55,2250.96 6190.91,2250.96 T6.2 ; v1(4625.98,4488.19) 4627.05,4488.19 4637.68,4477.56 M1.14@4744.09,4477.56
  Bottom Layer w19.68: v1(4625.98,4488.19) 4507.87,4606.3 4507.87,5059.06 v1(4645.67,5196.85)
T7_Out: M1.15 R7.1 T7.2 | length 5520.9
  Top Layer w19.68: M1.15@4744.09,4427.56 4430.71,4427.56 4212.6,4645.67 4212.6,4901.57 4370.08,5059.06 v1(6496.06,5059.06) ; v1(8307.09,5059.06) 8426.2,4939.94 8426.2,4862.2 8546.93,4862.2 T7.2
  Bottom Layer w19.68: v1(6496.06,5059.06) v1(8307.09,5059.06)
pads on no net: C1.9 C1.10 C2. M1.5 M1.6 M1.7 T1. T2. T3. T4. T5. T6. T7. V1. V2. V3. V4. V5. V6. V7. V8.

## Silkscreen, mask and mechanical layers (free items; w line width, h text height)
Top Overlay:
  drawing of 26 lines, arcs and shapes, not listed
  text "Alice Ma / Braeden Hamson / Jade Nguyen / Pushpesh Sharma / Viking Motorsports / Accumulator Segment Board 1 / 03/31/2023" at 9074.8,4763.78 h59.06
  text "2x1 MUX / Select" at -157.48,3714.76 h27.56 r270
  text "2x1 MUX / Y1" at -649.61,3711.52 h27.56 r270
  text "2x1 MUX / Z" at -492.13,3701.67 h23.62 r270
  text "+5V" at -287.4,3664.27 h39.37 r270
  text "8x1 MUX / S1" at -314.96,3455.61 h27.56 r270
  text "8x1 MUX / S2" at -157.48,3445.77 h27.56 r270
  text "8x1 MUX / S0" at -492.13,3435.93 h27.56 r270
  text "GND" at -622.05,3388.68 h39.37 r270
  text "V_Tap 8" at -592.93,2638.86 h32 r90
  text "V_Tap 7" at -415.77,2638.86 h32 r90
  text "V_Tap 6" at -258.29,2638.86 h32 r90
  text "V_Tap 5" at -100.81,2638.86 h32 r90
  text "V_Tap 1" at -100.81,2379.01 h32 r90
  text "V_Tap 3" at -415.77,2373.68 h32 r90
  text "V_Tap 2" at -258.29,2373.68 h32 r90
  text "V_Tap 4" at -537.27,2368.68 h32 r90
DXF:
  circle w0.5: c237.82,317.81 r88.5
  circle w0.5: c237.82,5302.93 r88.5
  circle w0.5: c1664.16,4525.26 r29.53
  circle w0.5: c1664.16,2949.42 r98.43
  circle w0.5: c1664.16,1373.58 r29.53
  circle w0.5: c3856.09,1120.48 r98.43
  circle w0.5: c3856.09,2696.32 r29.53
  circle w0.5: c3856.09,4272.15 r98.43
  circle w0.5: c6048.02,2949.42 r98.43
  circle w0.5: c6048.02,1373.58 r29.53
  circle w0.5: c6048.02,4525.26 r29.53
  circle w0.5: c8239.95,2696.32 r29.53
  circle w0.5: c8239.95,4272.15 r98.43
  circle w0.5: c8239.95,1120.48 r98.43
  circle w0.5: c10431.88,1373.58 r29.53
  circle w0.5: c10431.88,2949.42 r98.43
  circle w0.5: c10431.88,4525.26 r29.53
  circle w0.5: c11858.22,5302.93 r88.5
  circle w0.5: c11858.22,317.81 r88.5
  lines w0.5: -1,5546.74 12097.03,5546.74 ; -1,78.99 -1,1117.38 ; -1,78.99 -1,1117.38 ; -1,78.99 12097.03,78.99 ; -1,78.99 12097.03,78.99 ; -1,1117.38 cw(c-1,867.38) 249,867.38 ; -1,1117.38 cw(c-1,867.38) 249,867.38 ; -1,4503.36 ccw(c-1,4753.36) 249,4753.36 ; -1,4503.36 ccw(c-1,4753.36) 249,4753.36 ; -1,4503.36 -1,5541.74 12097.03,5541.74 12097.03,4503.36 cw(c12097.03,4753.36) 11847.04,4753.36 ccw(c11308.65,4753.36) 11308.65,5291.74 787.39,5291.74 ; 249,867.38 ccw(c787.39,867.38) 787.39,328.99 ; 249,867.38 ccw(c787.39,867.38) 787.39,328.99 ; 249,4753.36 cw(c787.39,4753.36) 787.39,5291.74 ; 249,4753.36 cw(c787.39,4753.36) 787.39,5291.74 ; 787.39,328.99 11308.65,328.99 ; 787.39,328.99 11308.65,328.99 ; 11308.65,328.99 ccw(c11308.65,867.38) 11847.03,867.38 ; 11308.65,328.99 ccw(c11308.65,867.38) 11847.03,867.38 ; 11308.65,328.99 ccw(c11308.65,867.38) 11847.03,867.38 ; 11847.04,867.38 cw(c12097.03,867.38) 12097.03,1117.38 ; 11847.03,867.38 cw(c12097.03,867.38) 12097.04,1117.38 ; 12097.03,78.99 12097.03,5546.74 ; 12097.03,78.99 12097.03,5546.74 ; 12097.03,78.99 12097.03,1117.38